# Altium PCB PCB1.PcbDoc (part 1 of 3)
Units mil, origin at the board's own origin, x right, y up, seen from the top; angles counter-clockwise.
Board outline 1929.13 x 1929.13 mil, 2 copper layers (Top Layer, Bottom Layer); 46 components, 43 nets, 184 pads, 94 vias.
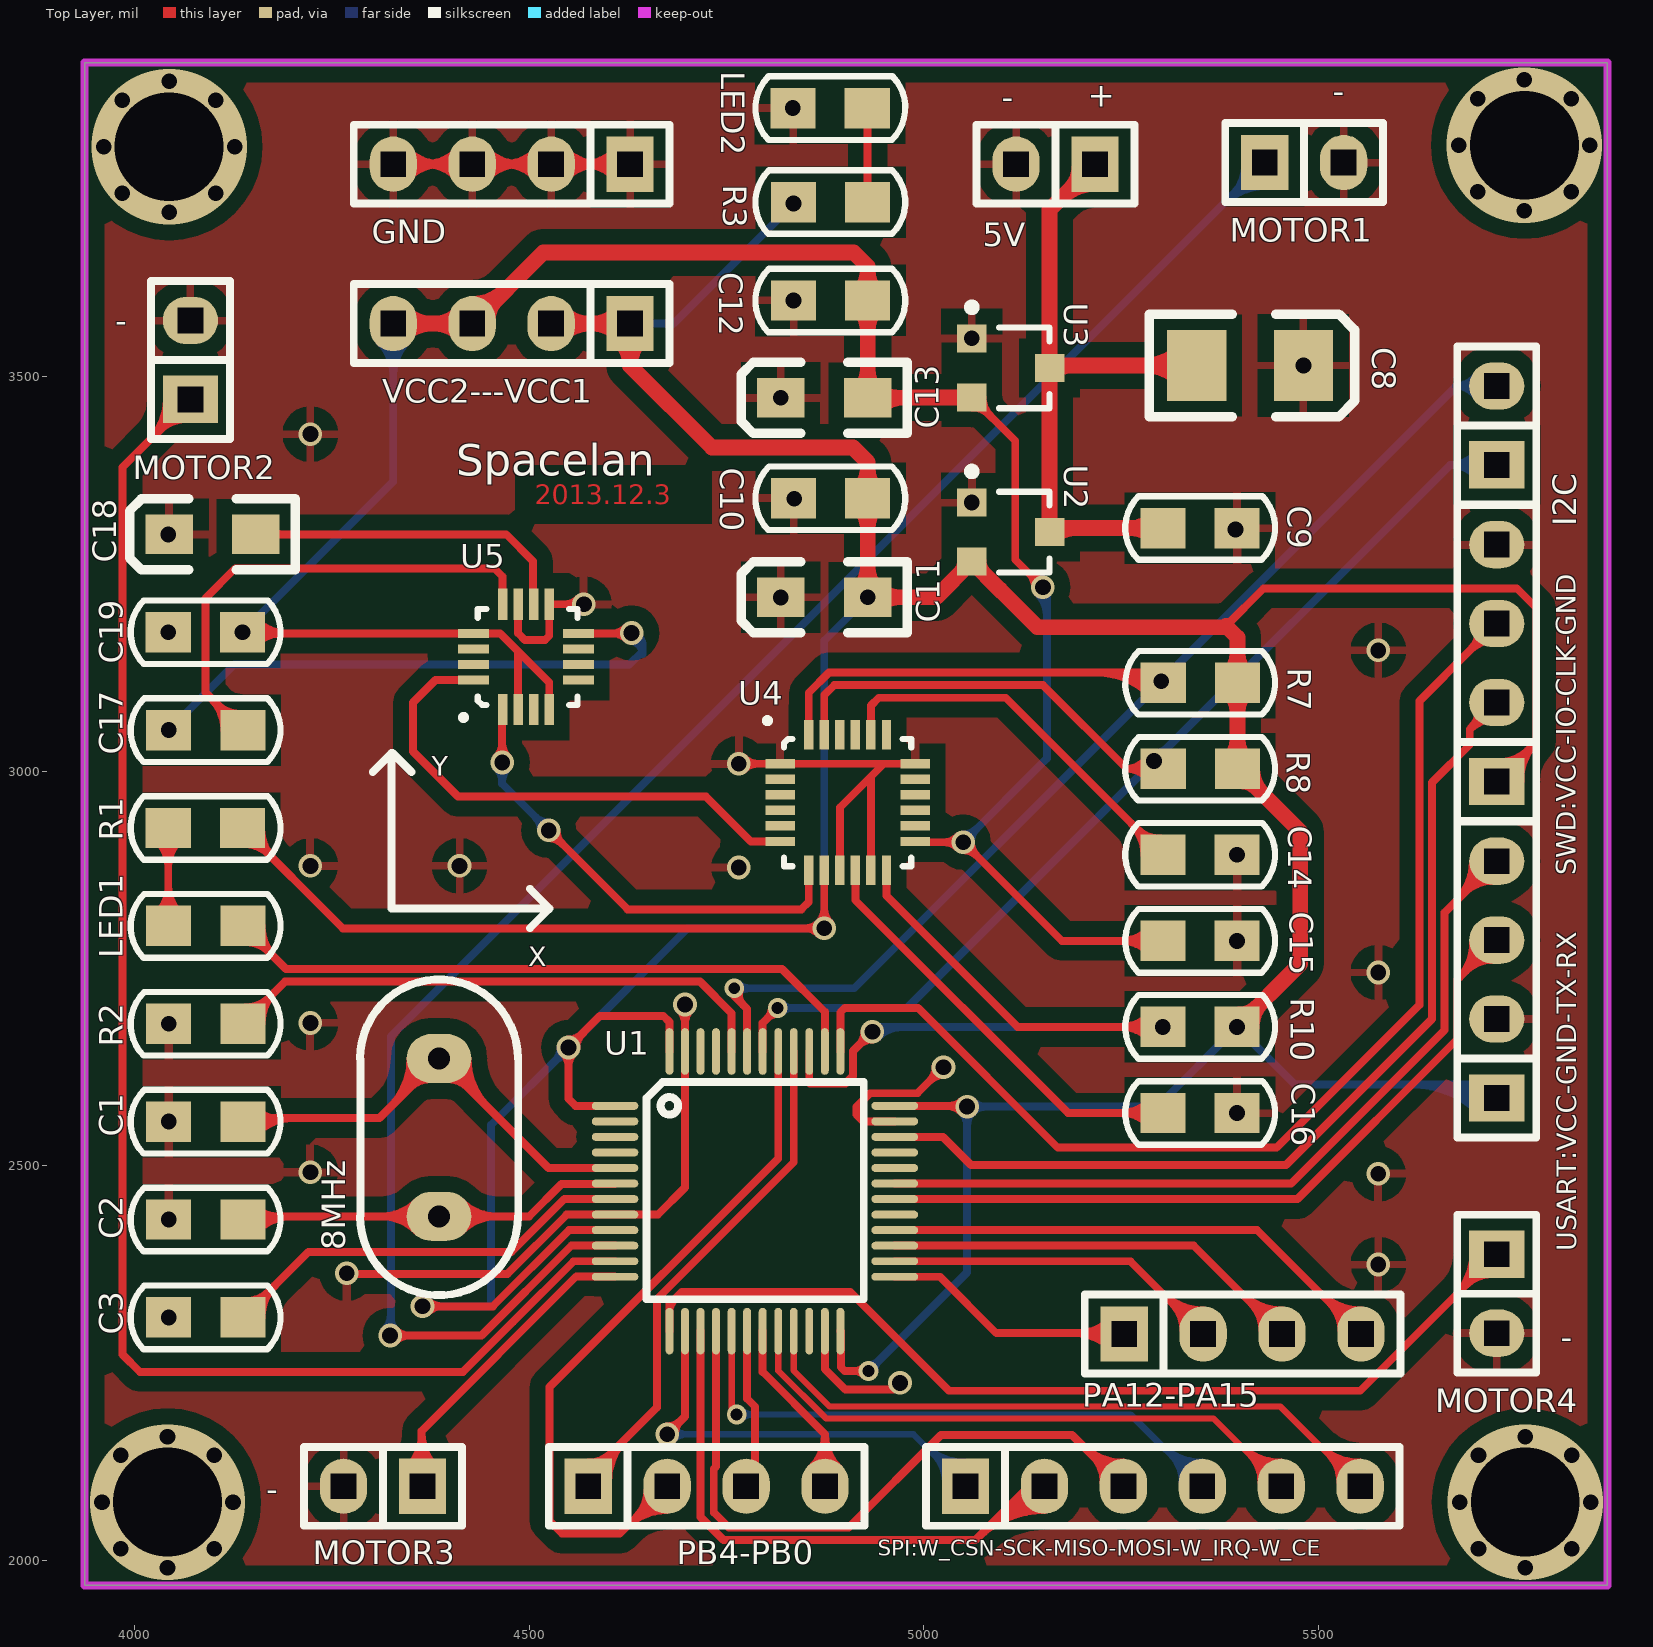
[diagram p0: Top Layer view]
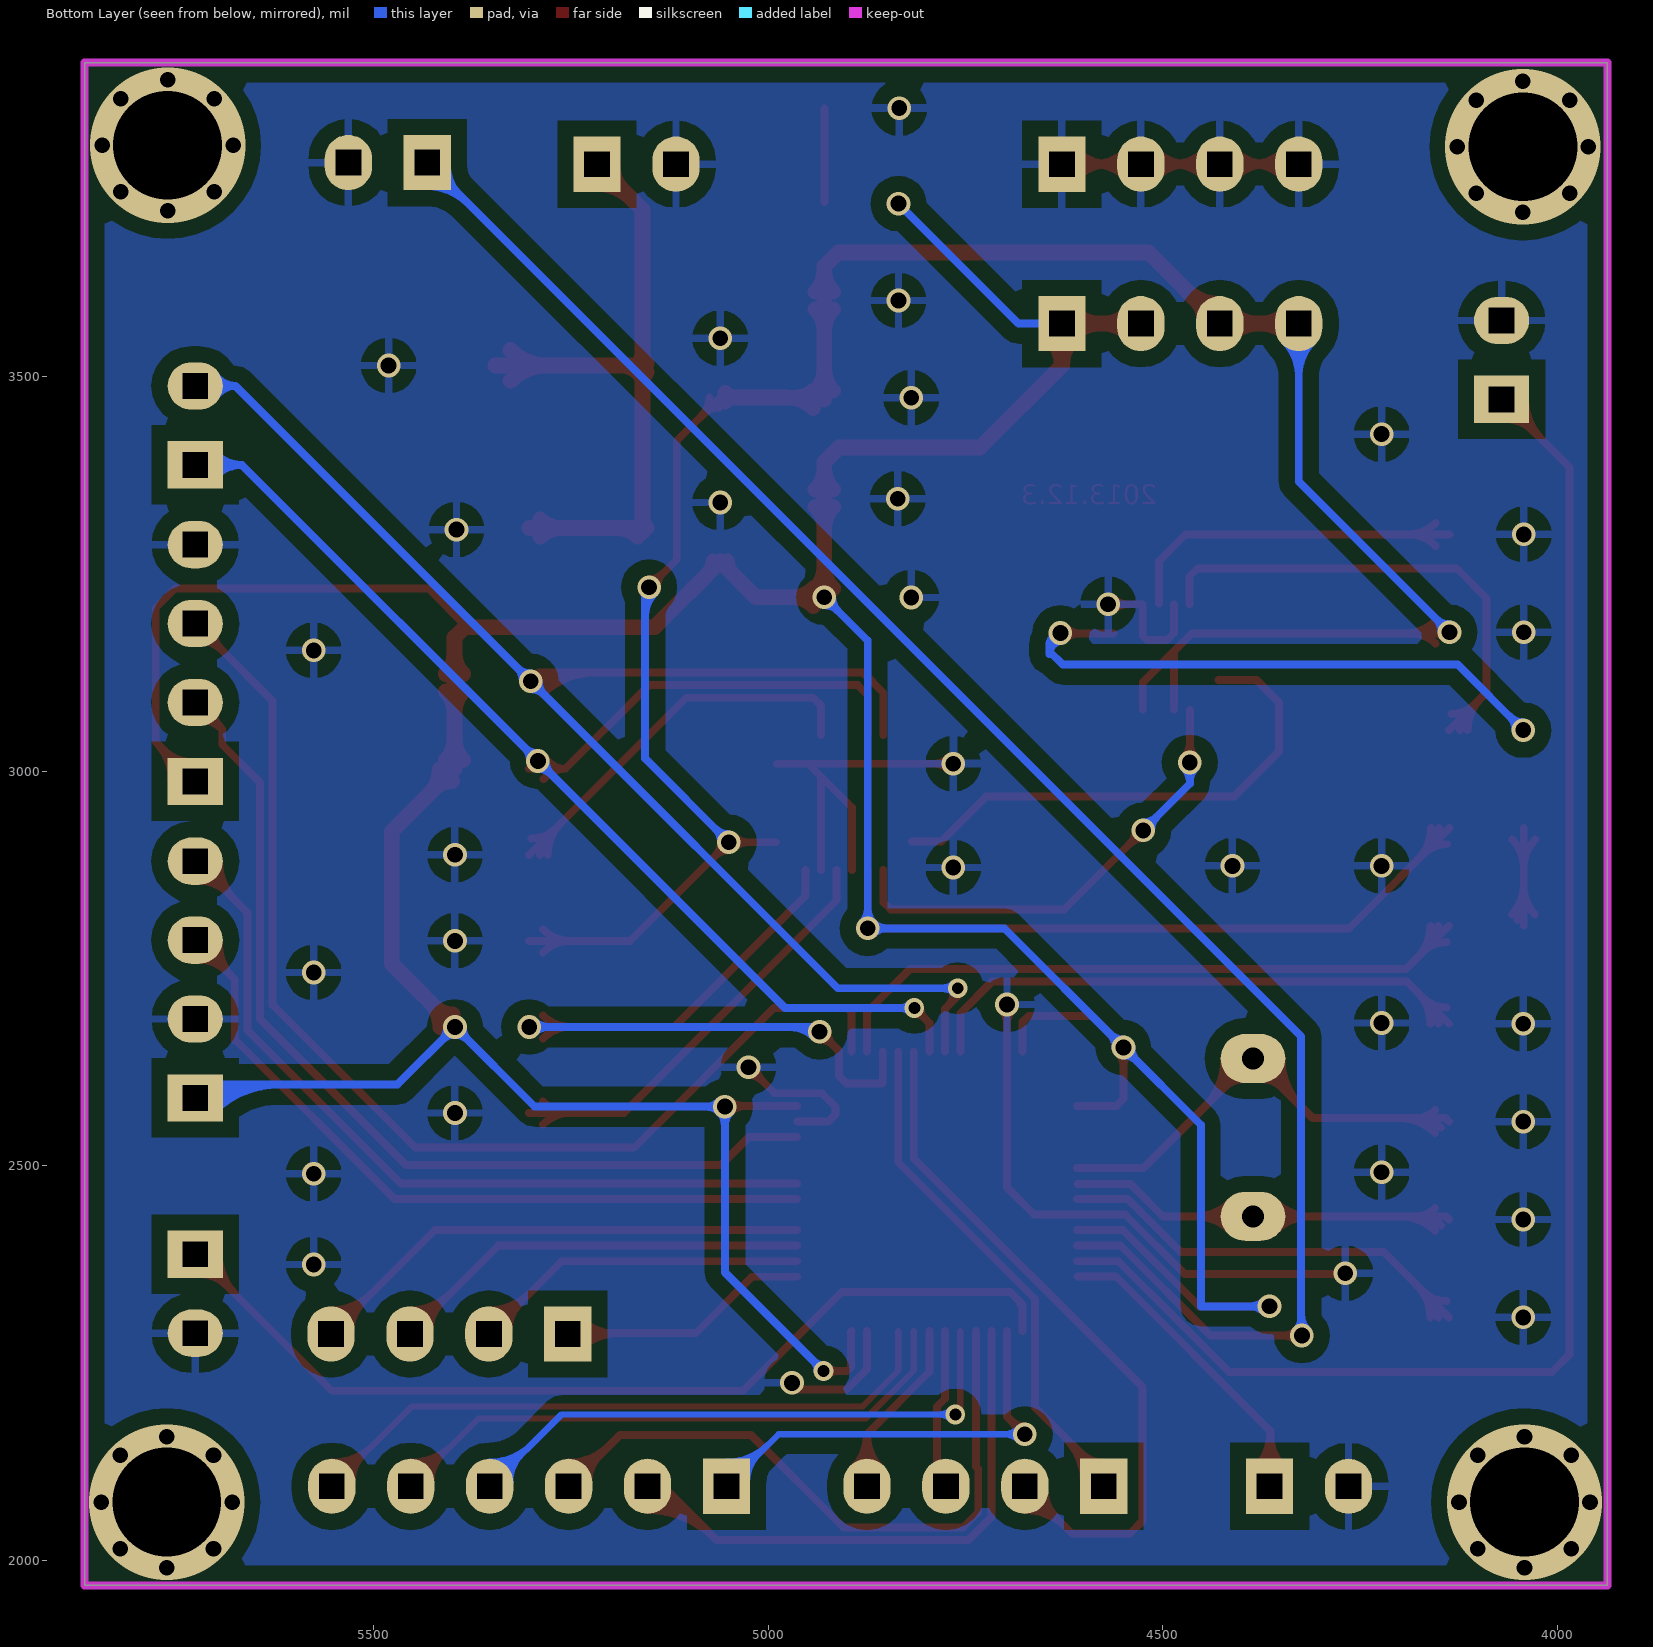
[diagram p1: Bottom Layer view, seen from below]

## Layer stack, top to bottom
Top Layer: signal copper 1.4
Dielectric: dielectric 12.6, FR-4, Dk 4.8
Bottom Layer: signal copper 1.4

## Board outline
3937.01,1968.5 5866.14,1968.5 5866.14,3897.64 3937.01,3897.64

## Design rules (kind name [scope] priority, off if disabled: settings)
Clearance Clearance_1 [InPolygon] p1: gap=20
Clearance [All] p2: gap=6
PolygonConnect [All] p1: connectstyle=Relief reliefconductorwidth=10 reliefentries=4 polygonreliefangle="90 Angle"
RoutingVias [All] p1: holewidth=20 width=40 viastyle="Through Hole" minholewidth=10 minwidth=10 maxholewidth=20 maxwidth=50
SilkscreenOverComponentPads [All] p1: minsilkscreentomaskgap=10
SolderMaskExpansion [All] p1: expansion=2
Width [All] p1: maxlimit=20 minlimit=6 preferedwidth=10
27 further rules are at their usual default settings.

## Classes and differential pairs
component class sensor: C14 C15 C16 C17 C18 C19 R7 R8 R10 U4 U5
component class mcu: 8MHz C1 C2 C3 I2C J20 LED1 MOTOR1 MOTOR2 MOTOR3 MOTOR4 PA12-PA15 PB4-PB0 R1 R2 SPI:W_CSN-SCK-MISO-MOSI-W_IRQ-W_CE SWD:VCC-IO-CLK-GND U1 USART:VCC-GND-TX-RX
component class BAT: 5V C8 C9 C10 C11 C12 C13 GND LED2 R3 U2 U3 VCC2---VCC1

## Components (designator, comment, footprint, x,y, rotation, side; value= is the part's Value field where it differs from the comment)
5V "CON2" SIP2 5167,3769 r180 top (schematic designator J12)
8MHz "XTAL_2PIN" XTAL 4386,2536 r90 top
C1 "20pf" linren_0805C 4043.5,2556 r0 top
C2 "20pf" linren_0805C 4043.5,2432 r0 top
C3 "0.1uf" linren_0805C 4043.5,2308 r0 top
C8 "47uf" 3528 5346,3514 r0 top
C9 "0.1uf" linren_0805C 5397,3308 r180 top
C10 "0.1uf" linren_0805C 4835,3345.67 r0 top
C11 "10uf" 3216 4929.06,3220.33 r180 top
C12 "0.1uf" linren_0805C 4835,3596.33 r0 top
C13 "10uf" 3216 4929.06,3473 r180 top
C14 "2.2nf" linren_0805C 5397,2894 r180 top
C15 "0.1uf" linren_0805C 5397,2785 r180 top
C16 "0.1uf" linren_0805C 5397,2567 r180 top
C17 "0.22uf" linren_0805C 4043.5,3052 r0 top
C18 "4.7uf" 3216 4154,3300 r180 top
C19 "0.1uf" linren_0805C 4137,3176 r180 top
GND "CON4" SIP4 4478,3769 r180 top (schematic designator J11)
I2C "CON2" SIP2 5726,3438 r90 top
LED1 "LED" linren_0805C 4043.5,2804 r0 top
LED2 "LED" linren_0805C 4928.5,3840 r180 top
MOTOR1 "CON2" SIP2 5482,3771 r0 top (schematic designator J5)
MOTOR2 "CON2" SIP2 4071,3521 r90 top (schematic designator J6)
MOTOR3 "CON2" SIP2 4315,2094 r180 top (schematic designator J7)
MOTOR4 "CON2" SIP2 5726,2338 r270 top (schematic designator J8)
PA12-PA15 "CON4" SIP4 5404,2287 r0 top
PB4-PB0 "CON44" SIP4 4725,2094 r0 top (schematic designator J9)
R1 "470" linren_0805C 4137,2928 r180 top
R2 "10k" linren_0805C 4043.5,2680 r0 top
R3 "470" linren_0805C 4835,3721 r0 top
R7 "10k" linren_0805C 5303.5,3112 r0 top
R8 "10k" linren_0805C 5303.5,3003 r0 top
R10 "10k" linren_0805C 5397,2676 r180 top
SPI:W_CSN-SCK-MISO-MOSI-W_IRQ-W_CE "CON6" SIP6 5053,2094 r0 top (schematic designator J1)
SWD:VCC-IO-CLK-GND "CON4" SIP4 5726,3137 r90 top (schematic designator J4)
U1 "STM32" LQFP-48 4609,2576 r0 top
U2 "me6206" "SOT 23" 5056,3340.33 r270 top
U3 "me6206" "SOT 23" 5056,3548.33 r270 top
U4 "MPU6050" "24 Lead QFN" 4809,2894 r0 top
U5 "HMC5883L" "16 Lead QFN 2" 4467,3080 r90 top
USART:VCC-GND-TX-RX "CON4" SIP4 5726,2736 r90 top (schematic designator J3)
VCC2---VCC1 "CON4" SIP4 4478,3567 r180 top (schematic designator J10)
? "" 固定过孔 4044,3791 r0 top
? "" 固定过孔 5761,3793 r0 top
? "" 固定过孔 5762,2074 r0 top
? "" 固定过孔 4042,2074 r0 top

## Footprints (in the part's own frame and the unit in brackets; to place one, negate y for a bottom-side part, rotate by r counter-clockwise, add the part's x,y. Pads: shape width x height; smd on the part's side, far side on the other; paste and mask are expansions set on the pad)
"16 Lead QFN 2" [mm]
  rect 1x0.3 smd: 1(-0.042,0.011) 2(-0.042,-0.489) 3(-0.042,-0.989) 4(-0.042,-1.489) 9(3.34,-1.489) 10(3.34,-0.989) 11(3.34,-0.489) 12(3.34,0.011)
  rect 0.3x1 smd: 5(0.899,-2.43) 6(1.399,-2.43) 7(1.899,-2.43) 8(2.399,-2.43) 13(2.399,0.952) 14(1.899,0.952) 15(1.399,0.952) 16(0.899,0.952)
  silkscreen extent -0.35,-2.4 3.18,1.32, body extent 0.13,-2.41 3.17,0.76, height 0.76
"24 Lead QFN" [mm]
  rect 0.95x0.3 smd: 1(0.228,2.932) 2(0.228,2.432) 3(0.228,1.932) 4(0.228,1.432) 5(0.228,0.932) 6(0.228,0.432) 13(4.578,0.432) 14(4.578,0.932) 15(4.578,1.432) 16(4.578,1.932) 17(4.578,2.432) 18(4.578,2.932)
  rect 0.3x0.95 smd: 7(1.153,-0.493) 8(1.653,-0.493) 9(2.153,-0.493) 10(2.653,-0.493) 11(3.153,-0.493) 12(3.653,-0.493) 19(3.653,3.857) 20(3.153,3.857) 21(2.653,3.857) 22(2.153,3.857) 23(1.653,3.857) 24(1.153,3.857)
  silkscreen extent -0.23,-0.37 4.45,4.37, body extent 0.38,-0.38 4.44,3.68, height 0.89
3216 [mil]
  rect 60x50 smd: A(0,0) K(110,0)
  silkscreen extent -50,-45 160,45
3528 [mil]
  rect 75x90 smd: A(0,0) K(135,0)
  silkscreen extent -60,-65 200,65
linren_0805C [mm]
  rect 1.45x1.3 smd: 1(0,0) 2(2.389,0)
  silkscreen extent -1.22,-1.02 3.6,1.02
LQFP-48 [mm]
  oval 1.5x0.254 smd: 1(0,0) 2(0,-0.5) 3(0,-1) 4(0,-1.5) 5(0,-2) 6(0,-2.5) 7(0,-3) 8(0,-3.5) 9(0,-4) 10(0,-4.5) 11(0,-5) 12(0,-5.5) 25(9,-5.5) 26(9,-5) 27(9,-4.5) 28(9,-4) 29(9,-3.5) 30(9,-3) 31(9,-2.5) 32(9,-2) 33(9,-1.5) 34(9,-1) 35(9,-0.5) 36(9,0)
  oval 0.254x1.5 smd: 13(1.75,-7.25) 14(2.25,-7.25) 15(2.75,-7.25) 16(3.25,-7.25) 17(3.75,-7.25) 18(4.25,-7.25) 19(4.75,-7.25) 20(5.25,-7.25) 21(5.75,-7.25) 22(6.25,-7.25) 23(6.75,-7.25) 24(7.25,-7.25) 37(7.25,1.75) 38(6.75,1.75) 39(6.25,1.75) 40(5.75,1.75) 41(5.25,1.75) 42(4.75,1.75) 43(4.25,1.75) 44(3.75,1.75) 45(3.25,1.75) 46(2.75,1.75) 47(2.25,1.75) 48(1.75,1.75)
  silkscreen extent 1.02,-6.22 8,0.76, body extent 0,-7.24 9,1.76, height 1.5
SIP2 [mil]
  rect 60x70 hole 32 square: 1(-50,0)
  oval 60x70 hole 32 square: 2(50,0)
  silkscreen extent -100,-50 100,50
SIP4 [mil]
  rect 60x70 hole 32 square: 1(-150,0)
  oval 60x70 hole 32 square: 2(-50,0) 3(50,0) 4(150,0)
  silkscreen extent -200,-50 200,50
SIP6 [mil]
  rect 60x70 hole 32 square: 1(0,0)
  oval 60x70 hole 32 square: 2(100,0) 3(200,0) 4(300,0) 5(400,0) 6(500,0)
  silkscreen extent -50,-50 550,50
"SOT 23" [mm]
  rect 0.9x0.95 smd: 1(0,0.127) 2(1.9,0.127) 3(0.95,2.627)
  silkscreen extent -1.12,0 2.25,2.63, body extent -0.38,0.51 2.29,2.29, height 0.89
XTAL [mil]
  oval 62x82 hole 28: 1(-100,0) 2(100,0)
  silkscreen extent -200,-100 200,100
固定过孔 [mil]

## Part data
5V PA12-PA15 SWD:VCC-IO-CLK-GND USART:VCC-GND-TX-RX: "Connector"
C1 C2 C3 C9 C10 C11 C12 C13 C14 C15 C16 C17 C18 C19: library part C
C8: library part "Cap 10uF", "Polarized Capacitor"
PB4-PB0: library part CON4, "Connector"
R1 R2 R3 R7 R8 R10: library part R
U1: library part Component_1_1
U2 U3: library part 78L05, "3-Terminal Positive Voltage Regulator"
U4 U5: library part Component_1

## Via types
v1: diameter 30, hole 20, Top Layer to Bottom Layer, 54 vias
v2: diameter 19.68, hole 19.68, Top Layer to Bottom Layer, 32 vias
v3: diameter 25, hole 15, Top Layer to Bottom Layer, 4 vias
v4: diameter 196.85, hole 137.8, Top Layer to Bottom Layer, 4 vias

## Nets (pads, with @x,y where several pads share a name; then routed paths per layer and width w, separated by ;. In a path a pad name is that pad's centre, name@x,y a point inside that pad or via, vN(x,y) a via of type N, cw(c..) or ccw(c..) an arc to the next point about the centre after c; other vN are vias at no path point)
AUX_CL: U4.7 U5.1 | length 1085.1
  Top Layer w10: v1(4466,3011) U5.1@4466,3077.78 ; v1(4525,2925) 4625,2825 4845,2825 4854.39,2834.39 U4.7@4854.39,2874.59 ; 4466,3035.14 cw(c4441.86,3035.14) 4458.93,3018.07 ccw(c4441.86,3035.14) 4466,3035.14 ; 4466,3035.14 ccw(c4490.14,3035.14) 4473.07,3018.07 cw(c4490.14,3035.14) 4466,3035.14 ; v1@4525,2915 cw(c4525,2890.86) 4542.07,2907.93 ; v1@4525,2915 cw(c4525,2890.86) 4542.07,2907.93 ; v1@4525,2915 cw(c4525,2890.86) 4542.07,2907.93 ; v1@4525,2915 cw(c4525,2890.86) 4542.07,2907.93 ; v1@4525,2917.5 cw(c4525,2899.39) 4537.8,2912.2 ; v1@4525,2917.5 cw(c4525,2899.39) 4537.8,2912.2 ; v1@4525,2917.5 cw(c4525,2899.39) 4537.8,2912.2 ; v1@4525,2917.5 cw(c4525,2899.39) 4537.8,2912.2 ; v1@4532.5,2925 ccw(c4550.61,2925) 4537.8,2912.2 ; v1@4532.5,2925 ccw(c4550.61,2925) 4537.8,2912.2 ; v1@4532.5,2925 ccw(c4550.61,2925) 4537.8,2912.2 ; v1@4532.5,2925 ccw(c4550.61,2925) 4537.8,2912.2 ; v1@4535,2925 ccw(c4559.14,2925) 4542.07,2907.93 ; v1@4535,2925 ccw(c4559.14,2925) 4542.07,2907.93 ; v1@4535,2925 ccw(c4559.14,2925) 4542.07,2907.93 ; v1@4535,2925 ccw(c4559.14,2925) 4542.07,2907.93
  Bottom Layer w10: v1(4466,3011) 4466,2984 v1(4525,2925) ; 4466,2986.86 cw(c4490.14,2986.86) 4473.07,3003.93 ccw(c4490.14,2986.86) 4466,2986.86 ; 4466,2986.86 ccw(c4441.86,2986.86) 4458.93,3003.93 cw(c4441.86,2986.86) 4466,2986.86 ; 4507.93,2942.07 cw(c4490.86,2925) 4515,2925 ccw(c4490.86,2925) 4507.93,2942.07 ; 4507.93,2942.07 ccw(c4525,2959.14) 4525,2935 cw(c4525,2959.14) 4507.93,2942.07
AUX_DA: U4.6 U5.16 | length 662.5
  Top Layer w10: U5.16@4429.52,3115.39 4381.39,3115.39 4353,3087 4353,3025 4410,2968 4724.02,2968 4781.01,2911.01 U4.6@4817.98,2911.01
BAT: 5V.1 C8.A C9.2 U2.3 U3.3 | length 1682.7
  Top Layer w20: U2.3@5159.43,3302.93 U3.3@5159.43,3510.93 5159.43,3711.43 5V.1@5217,3769 ; U2.3@5164.49,3308 C9.2@5302.94,3308 ; U2.3@5165.87,3297.48 cw(c5191.27,3272.07) 5191.27,3308 ; U3.3@5165.87,3505.48 cw(c5186.45,3484.89) 5186.45,3514 ; U3.3@5167.27,3514 C8.A@5346,3514 ; 5174.32,3726.32 cw(c5217,3683.64) 5V.1@5217,3744 ; 5186.39,3738.39 ccw(c5160.79,3764) 5V.1@5197,3764 ; C9.2@5288.96,3296.98 ccw(c5262.35,3270.36) 5262.35,3308 ccw(c5262.35,3345.64) C9.2@5288.96,3319.02 ; C8.A@5326.55,3494.55 ccw(c5279.61,3447.61) 5279.61,3514 ccw(c5279.61,3580.39) C8.A@5326.55,3533.45 ; U2.3@5153.97,3308.39 ccw(c5140.79,3321.56) 5159.43,3321.56 ; U2.3@5153.97,3308.39 ccw(c5140.8,3321.56) 5159.43,3321.56 ; U2.3@5153.97,3308.39 ccw(c5140.8,3321.56) 5159.43,3321.56 ; U2.3@5153.97,3308.39 ccw(c5140.8,3321.56) 5159.43,3321.56 ; U2.3@5153.97,3308.39 ccw(c5140.8,3321.56) 5159.43,3321.56 ; U2.3@5153.97,3308.39 ccw(c5140.8,3321.56) 5159.43,3321.56 ; U2.3@5153.97,3308.39 ccw(c5140.8,3321.56) 5159.43,3321.56 ; U2.3@5153.97,3308.39 ccw(c5140.8,3321.56) 5159.43,3321.56 ; U3.3@5153.97,3505.48 cw(c5140.8,3492.3) 5159.43,3492.3 ; U3.3@5153.97,3505.48 cw(c5140.8,3492.3) 5159.43,3492.3 ; U3.3@5153.97,3505.48 cw(c5140.8,3492.3) 5159.43,3492.3 ; U3.3@5153.97,3505.48 cw(c5140.8,3492.3) 5159.43,3492.3 ; U3.3@5153.97,3505.48 cw(c5140.8,3492.3) 5159.43,3492.3 ; U3.3@5153.97,3505.48 cw(c5140.8,3492.3) 5159.43,3492.3 ; U3.3@5153.97,3505.48 cw(c5140.8,3492.3) 5159.43,3492.3 ; U3.3@5153.97,3505.48 cw(c5140.8,3492.3) 5159.43,3492.3 ; U3.3@5153.97,3516.39 ccw(c5140.8,3529.56) 5159.43,3529.56 ; U3.3@5153.97,3516.39 ccw(c5140.8,3529.56) 5159.43,3529.56 ; U3.3@5153.97,3516.39 ccw(c5140.8,3529.56) 5159.43,3529.56 ; U3.3@5153.97,3516.39 ccw(c5140.8,3529.56) 5159.43,3529.56 ; U3.3@5153.97,3516.39 ccw(c5140.8,3529.56) 5159.43,3529.56 ; U3.3@5153.97,3516.39 ccw(c5140.8,3529.56) 5159.43,3529.56 ; U3.3@5153.97,3516.39 ccw(c5140.8,3529.56) 5159.43,3529.56 ; U3.3@5153.97,3516.39 ccw(c5140.8,3529.56) 5159.43,3529.56 ; 5159.43,3321.56 ccw(c5178.05,3321.56) U2.3@5164.88,3308.39 ; 5159.43,3321.56 ccw(c5178.06,3321.56) U2.3@5164.88,3308.39 ; 5159.43,3321.56 ccw(c5178.06,3321.56) U2.3@5164.88,3308.39 ; 5159.43,3321.56 ccw(c5178.06,3321.56) U2.3@5164.88,3308.39 ; 5159.43,3492.3 cw(c5178.06,3492.3) U3.3@5164.88,3505.48 ; 5159.43,3492.3 cw(c5178.06,3492.3) U3.3@5164.88,3505.48 ; 5159.43,3492.3 cw(c5178.06,3492.3) U3.3@5164.88,3505.48 ; 5159.43,3492.3 cw(c5178.06,3492.3) U3.3@5164.88,3505.48 ; 5159.43,3529.56 ccw(c5178.06,3529.56) U3.3@5164.88,3516.39 ; 5159.43,3529.56 ccw(c5178.06,3529.56) U3.3@5164.88,3516.39 ; 5159.43,3529.56 ccw(c5178.06,3529.56) U3.3@5164.88,3516.39 ; 5159.43,3529.56 ccw(c5178.06,3529.56) U3.3@5164.88,3516.39 ; 5159.43,3529.56 ccw(c5178.06,3529.56) U3.3@5164.88,3516.39 ; 5159.43,3529.56 ccw(c5178.06,3529.56) U3.3@5164.88,3516.39 ; 5159.43,3529.56 ccw(c5178.06,3529.56) U3.3@5164.88,3516.39 ; 5159.43,3529.56 ccw(c5178.06,3529.56) U3.3@5164.88,3516.39
COM_RXD: U1.31 USART:VCC-GND-TX-RX.4 | length 1846.2
  Top Layer w10: U1.31@4963.33,2477.58 5465.58,2477.58 5660,2672 5660,2821 USART:VCC-GND-TX-RX.4@5726,2887 ; 5675.49,2836.49 ccw(c5625.99,2886) USART:VCC-GND-TX-RX.4@5696,2886 ; 5675.49,2836.49 ccw(c5625.99,2886) USART:VCC-GND-TX-RX.4@5696,2886 ; 5675.49,2836.49 ccw(c5625.99,2886) USART:VCC-GND-TX-RX.4@5696,2886 ; 5675.49,2836.49 ccw(c5625.99,2886) USART:VCC-GND-TX-RX.4@5696,2886 ; 5685.15,2846.15 cw(c5721,2810.3) USART:VCC-GND-TX-RX.4@5721,2861 ; 5685.15,2846.15 cw(c5721,2810.3) USART:VCC-GND-TX-RX.4@5721,2861 ; 5685.15,2846.15 cw(c5721,2810.3) USART:VCC-GND-TX-RX.4@5721,2861 ; 5685.15,2846.15 cw(c5721,2810.3) USART:VCC-GND-TX-RX.4@5721,2861 ; 5691.86,2852.86 cw(c5726,2818.72) USART:VCC-GND-TX-RX.4@5726,2867 ; 5691.86,2852.86 ccw(c5657.72,2887) USART:VCC-GND-TX-RX.4@5706,2887 ; 5691.86,2852.86 cw(c5726,2818.72) USART:VCC-GND-TX-RX.4@5726,2867 ; 5691.86,2852.86 ccw(c5657.72,2887) USART:VCC-GND-TX-RX.4@5706,2887 ; 5691.86,2852.86 cw(c5726,2818.72) USART:VCC-GND-TX-RX.4@5726,2867 ; 5691.86,2852.86 ccw(c5657.72,2887) USART:VCC-GND-TX-RX.4@5706,2887 ; 5691.86,2852.86 cw(c5726,2818.72) USART:VCC-GND-TX-RX.4@5726,2867 ; 5691.86,2852.86 ccw(c5657.72,2887) USART:VCC-GND-TX-RX.4@5706,2887 ; 5692.56,2853.56 ccw(c5660.13,2886) USART:VCC-GND-TX-RX.4@5706,2886 ; 5692.56,2853.56 ccw(c5660.13,2886) USART:VCC-GND-TX-RX.4@5706,2886 ; 5692.56,2853.56 ccw(c5660.13,2886) USART:VCC-GND-TX-RX.4@5706,2886 ; 5692.56,2853.56 ccw(c5660.13,2886) USART:VCC-GND-TX-RX.4@5706,2886
COM_TXD: U1.30 USART:VCC-GND-TX-RX.3 | length 1434.6
  Top Layer w10: U1.30@4963.33,2457.89 5473.66,2457.89 5674.77,2659 5676,2659 5676,2736 USART:VCC-GND-TX-RX.3@5726,2786 ; 5678.5,2738.5 ccw(c5635.92,2781.09) USART:VCC-GND-TX-RX.3@5696.04,2784.56 ; 5678.5,2738.5 ccw(c5635.92,2781.09) USART:VCC-GND-TX-RX.3@5696.04,2784.56 ; 5678.5,2738.5 ccw(c5635.92,2781.09) USART:VCC-GND-TX-RX.3@5696.04,2784.56 ; 5678.5,2738.5 ccw(c5635.92,2781.09) USART:VCC-GND-TX-RX.3@5696.04,2784.56 ; 5686.86,2746.86 cw(c5721,2712.72) USART:VCC-GND-TX-RX.3@5721,2761 ; 5686.86,2746.86 cw(c5721,2712.72) USART:VCC-GND-TX-RX.3@5721,2761 ; 5686.86,2746.86 cw(c5721,2712.72) USART:VCC-GND-TX-RX.3@5721,2761 ; 5686.86,2746.86 cw(c5721,2712.72) USART:VCC-GND-TX-RX.3@5721,2761 ; 5694.27,2754.27 ccw(c5665.73,2782.81) USART:VCC-GND-TX-RX.3@5706.02,2785.14 ; 5694.27,2754.27 ccw(c5665.73,2782.81) USART:VCC-GND-TX-RX.3@5706.02,2785.14 ; 5694.27,2754.27 ccw(c5665.73,2782.81) USART:VCC-GND-TX-RX.3@5706.02,2785.14 ; 5694.27,2754.27 ccw(c5665.73,2782.81) USART:VCC-GND-TX-RX.3@5706.02,2785.14
GND: 5V.2 C1.1 C2.1 C3.1 C8.K C9.1 C10.1 C11.K C12.1 C13.K C14.1 C15.1 C16.1 C18.K C19.2 GND.1 GND.2 GND.3 GND.4 LED2.2 MOTOR1.2 MOTOR2.2 MOTOR3.2 MOTOR4.2 R2.1 SWD:VCC-IO-CLK-GND.4 U1.8 U1.23 U1.35 U1.47 U2.1 U3.1 U4.1 U4.9 U4.11 U4.18 U5.9 U5.11 USART:VCC-GND-TX-RX.2 | length 7402.7
  Top Layer w10: v1@4270,2363 4472.49,2363 4547.69,2438.2 U1.8@4609,2438.2 4663.2,2438.2 4697.58,2472.58 U1.47@4697.58,2644.9 v1(4697.58,2704.42) ; GND.4@4328,3769 GND.3@4428,3769 GND.2@4528,3769 GND.1@4628,3769 ; U5.11@4486.25,3211.5 4486.25,3174.75 4495,3166 4520,3166 4525.62,3171.62 U5.9@4525.62,3211.5 v1(4569.5,3211.5) ; v1(4765.57,3009.43) U4.1@4817.98,3009.43 4949.43,3009.43 ; U1.23@4874.75,2290.57 4874.75,2242.62 4900.87,2216.5 4961.5,2216.5 v1(4970,2225) ; U4.9@4893.76,2874.59 4893.76,2953.76 4949.43,3009.43 ; U4.11@4933.13,2874.59 4933.13,2990.08 ; U1.35@4963.33,2556.32 4923.68,2556.32 4915,2565 4915,2574.82 4932.18,2592 4992,2592 v1(5025,2625) ; U4.18@4989.24,3009.43 4949.43,3009.43 ; GND.4@4338.61,3758.39 cw(c4364.21,3732.79) 4364.21,3769 ; GND.4@4338.61,3758.39 cw(c4364.21,3732.79) 4364.21,3769 ; GND.4@4338.61,3758.39 cw(c4364.21,3732.79) 4364.21,3769 ; GND.4@4338.61,3758.39 cw(c4364.21,3732.79) 4364.21,3769 ; GND.4@4338.61,3758.39 cw(c4364.21,3732.79) 4364.21,3769 ; GND.4@4338.61,3779.61 ccw(c4364.21,3805.21) 4364.21,3769 ; GND.4@4338.61,3779.61 ccw(c4364.21,3805.21) 4364.21,3769 ; GND.4@4338.61,3779.61 ccw(c4364.21,3805.21) 4364.21,3769 ; GND.4@4338.61,3779.61 ccw(c4364.21,3805.21) 4364.21,3769 ; GND.4@4338.61,3779.61 ccw(c4364.21,3805.21) 4364.21,3769 ; GND.4@4345.68,3751.32 cw(c4388.36,3708.64) 4388.36,3769 ; GND.4@4345.68,3751.32 cw(c4388.36,3708.64) 4388.36,3769 ; GND.4@4345.68,3751.32 cw(c4388.36,3708.64) 4388.36,3769 ; GND.4@4345.68,3751.32 cw(c4388.36,3708.64) 4388.36,3769 ; GND.4@4345.68,3751.32 cw(c4388.36,3708.64) 4388.36,3769 ; GND.4@4345.68,3786.68 ccw(c4388.36,3829.36) 4388.36,3769 ; GND.4@4345.68,3786.68 ccw(c4388.36,3829.36) 4388.36,3769 ; GND.4@4345.68,3786.68 ccw(c4388.36,3829.36) 4388.36,3769 ; GND.4@4345.68,3786.68 ccw(c4388.36,3829.36) 4388.36,3769 ; GND.4@4345.68,3786.68 ccw(c4388.36,3829.36) 4388.36,3769 ; 4367.64,3769 cw(c4367.64,3708.64) GND.3@4410.32,3751.32 ; 4367.64,3769 ccw(c4367.64,3829.36) GND.3@4410.32,3786.68 ; 4367.64,3769 cw(c4367.64,3708.64) GND.3@4410.32,3751.32 ; 4367.64,3769 ccw(c4367.64,3829.36) GND.3@4410.32,3786.68 ; 4367.64,3769 cw(c4367.64,3708.64) GND.3@4410.32,3751.32 ; 4367.64,3769 ccw(c4367.64,3829.36) GND.3@4410.32,3786.68 ; 4367.64,3769 ccw(c4367.64,3829.36) GND.3@4410.32,3786.68 ; 4367.64,3769 cw(c4367.64,3708.64) GND.3@4410.32,3751.32 ; 4367.64,3769 ccw(c4367.64,3829.36) GND.3@4410.32,3786.68 ; 4367.64,3769 cw(c4367.64,3708.64) GND.3@4410.32,3751.32 ; 4391.79,3769 cw(c4391.79,3732.79) GND.3@4417.39,3758.39 ; 4391.79,3769 ccw(c4391.79,3805.21) GND.3@4417.39,3779.61 ; 4391.79,3769 cw(c4391.79,3732.79) GND.3@4417.39,3758.39 ; 4391.79,3769 ccw(c4391.79,3805.21) GND.3@4417.39,3779.61 ; 4391.79,3769 cw(c4391.79,3732.79) GND.3@4417.39,3758.39 ; 4391.79,3769 ccw(c4391.79,3805.21) GND.3@4417.39,3779.61 ; 4391.79,3769 ccw(c4391.79,3805.21) GND.3@4417.39,3779.61 ; 4391.79,3769 cw(c4391.79,3732.79) GND.3@4417.39,3758.39 ; 4391.79,3769 ccw(c4391.79,3805.21) GND.3@4417.39,3779.61 ; 4391.79,3769 cw(c4391.79,3732.79) GND.3@4417.39,3758.39 ; GND.3@4438.61,3758.39 cw(c4464.21,3732.79) 4464.21,3769 ; GND.3@4438.61,3758.39 cw(c4464.21,3732.79) 4464.21,3769 ; GND.3@4438.61,3758.39 cw(c4464.21,3732.79) 4464.21,3769 ; GND.3@4438.61,3758.39 cw(c4464.21,3732.79) 4464.21,3769 ; GND.3@4438.61,3758.39 cw(c4464.21,3732.79) 4464.21,3769 ; GND.3@4438.61,3779.61 ccw(c4464.21,3805.21) 4464.21,3769 ; GND.3@4438.61,3779.61 ccw(c4464.21,3805.21) 4464.21,3769 ; GND.3@4438.61,3779.61 ccw(c4464.21,3805.21) 4464.21,3769 ; GND.3@4438.61,3779.61 ccw(c4464.21,3805.21) 4464.21,3769 ; GND.3@4438.61,3779.61 ccw(c4464.21,3805.21) 4464.21,3769 ; GND.3@4445.68,3751.32 cw(c4488.36,3708.64) 4488.36,3769 ; GND.3@4445.68,3751.32 cw(c4488.36,3708.64) 4488.36,3769 ; GND.3@4445.68,3751.32 cw(c4488.36,3708.64) 4488.36,3769 ; GND.3@4445.68,3751.32 cw(c4488.36,3708.64) 4488.36,3769 ; GND.3@4445.68,3751.32 cw(c4488.36,3708.64) 4488.36,3769 ; GND.3@4445.68,3786.68 ccw(c4488.36,3829.36) 4488.36,3769 ; GND.3@4445.68,3786.68 ccw(c4488.36,3829.36) 4488.36,3769 ; GND.3@4445.68,3786.68 ccw(c4488.36,3829.36) 4488.36,3769 ; GND.3@4445.68,3786.68 ccw(c4488.36,3829.36) 4488.36,3769 ; GND.3@4445.68,3786.68 ccw(c4488.36,3829.36) 4488.36,3769 ; 4467.64,3769 cw(c4467.64,3708.64) GND.2@4510.32,3751.32 ; 4467.64,3769 ccw(c4467.64,3829.36) GND.2@4510.32,3786.68 ; 4467.64,3769 cw(c4467.64,3708.64) GND.2@4510.32,3751.32 ; 4467.64,3769 ccw(c4467.64,3829.36) GND.2@4510.32,3786.68 ; 4467.64,3769 cw(c4467.64,3708.64) GND.2@4510.32,3751.32 ; 4467.64,3769 ccw(c4467.64,3829.36) GND.2@4510.32,3786.68 ; 4467.64,3769 ccw(c4467.64,3829.36) GND.2@4510.32,3786.68 ; 4467.64,3769 cw(c4467.64,3708.64) GND.2@4510.32,3751.32 ; 4467.64,3769 ccw(c4467.64,3829.36) GND.2@4510.32,3786.68 ; 4467.64,3769 cw(c4467.64,3708.64) GND.2@4510.32,3751.32 ; 4491.79,3769 cw(c4491.79,3732.79) GND.2@4517.39,3758.39 ; 4491.79,3769 ccw(c4491.79,3805.21) GND.2@4517.39,3779.61 ; 4491.79,3769 cw(c4491.79,3732.79) GND.2@4517.39,3758.39 ; 4491.79,3769 ccw(c4491.79,3805.21) GND.2@4517.39,3779.61 ; 4491.79,3769 cw(c4491.79,3732.79) GND.2@4517.39,3758.39 ; 4491.79,3769 ccw(c4491.79,3805.21) GND.2@4517.39,3779.61 ; 4491.79,3769 ccw(c4491.79,3805.21) GND.2@4517.39,3779.61 ; 4491.79,3769 cw(c4491.79,3732.79) GND.2@4517.39,3758.39 ; 4491.79,3769 ccw(c4491.79,3805.21) GND.2@4517.39,3779.61 ; 4491.79,3769 cw(c4491.79,3732.79) GND.2@4517.39,3758.39 ; GND.2@4538.61,3758.39 cw(c4564.21,3732.79) 4564.21,3769 ; GND.2@4538.61,3758.39 cw(c4564.21,3732.79) 4564.21,3769 ; GND.2@4538.61,3758.39 cw(c4564.21,3732.79) 4564.21,3769 ; GND.2@4538.61,3758.39 cw(c4564.21,3732.79) 4564.21,3769 ; GND.2@4538.61,3758.39 cw(c4564.21,3732.79) 4564.21,3769 ; GND.2@4538.61,3779.61 ccw(c4564.21,3805.21) 4564.21,3769 ; GND.2@4538.61,3779.61 ccw(c4564.21,3805.21) 4564.21,3769 ; GND.2@4538.61,3779.61 ccw(c4564.21,3805.21) 4564.21,3769 ; GND.2@4538.61,3779.61 ccw(c4564.21,3805.21) 4564.21,3769 ; GND.2@4538.61,3779.61 ccw(c4564.21,3805.21) 4564.21,3769 ; 4545.36,3211.5 cw(c4545.36,3187.35) v1@4562.43,3204.42 ; 4545.36,3211.5 ccw(c4545.36,3235.64) v1@4562.43,3218.57 ; 4545.36,3211.5 cw(c4545.36,3187.35) v1@4562.43,3204.42 ; 4545.36,3211.5 ccw(c4545.36,3235.64) v1@4562.43,3218.57 ; 4545.36,3211.5 ccw(c4545.36,3235.64) v1@4562.43,3218.57 ; 4545.36,3211.5 cw(c4545.36,3187.35) v1@4562.43,3204.42 ; 4545.36,3211.5 ccw(c4545.36,3235.64) v1@4562.43,3218.57 ; 4545.36,3211.5 cw(c4545.36,3187.35) v1@4562.43,3204.42 ; GND.2@4545.68,3751.32 cw(c4588.36,3708.64) 4588.36,3769 ; GND.2@4545.68,3751.32 cw(c4588.36,3708.64) 4588.36,3769 ; GND.2@4545.68,3751.32 cw(c4588.36,3708.64) 4588.36,3769 ; GND.2@4545.68,3751.32 cw(c4588.36,3708.64) 4588.36,3769 ; GND.2@4545.68,3751.32 cw(c4588.36,3708.64) 4588.36,3769 ; GND.2@4545.68,3786.68 ccw(c4588.36,3829.36) 4588.36,3769 ; GND.2@4545.68,3786.68 ccw(c4588.36,3829.36) 4588.36,3769 ; GND.2@4545.68,3786.68 ccw(c4588.36,3829.36) 4588.36,3769 ; GND.2@4545.68,3786.68 ccw(c4588.36,3829.36) 4588.36,3769 ; GND.2@4545.68,3786.68 ccw(c4588.36,3829.36) 4588.36,3769 ; 4551.4,3211.5 cw(c4551.4,3193.39) v1@4564.2,3206.19 ; 4551.4,3211.5 ccw(c4551.4,3229.6) v1@4564.2,3216.8 ; 4551.4,3211.5 cw(c4551.4,3193.39) v1@4564.2,3206.19 ; 4551.4,3211.5 ccw(c4551.4,3229.6) v1@4564.2,3216.8 ; 4551.4,3211.5 cw(c4551.4,3193.39) v1@4564.2,3206.19 ; 4551.4,3211.5 ccw(c4551.4,3229.6) v1@4564.2,3216.8 ; 4551.4,3211.5 cw(c4551.4,3193.39) v1@4564.2,3206.19 ; 4551.4,3211.5 ccw(c4551.4,3229.6) v1@4564.2,3216.8 ; 4567.64,3769 cw(c4567.64,3708.64) GND.1@4610.32,3751.32 ; 4567.64,3769 ccw(c4567.64,3829.36) GND.1@4610.32,3786.68 ; 4567.64,3769 cw(c4567.64,3708.64) GND.1@4610.32,3751.32 ; 4567.64,3769 ccw(c4567.64,3829.36) GND.1@4610.32,3786.68 ; 4567.64,3769 cw(c4567.64,3708.64) GND.1@4610.32,3751.32 ; 4567.64,3769 ccw(c4567.64,3829.36) GND.1@4610.32,3786.68 ; 4567.64,3769 ccw(c4567.64,3829.36) GND.1@4610.32,3786.68 ; 4567.64,3769 cw(c4567.64,3708.64) GND.1@4610.32,3751.32 ; 4567.64,3769 ccw(c4567.64,3829.36) GND.1@4610.32,3786.68 ; 4567.64,3769 cw(c4567.64,3708.64) GND.1@4610.32,3751.32 ; 4591.79,3769 cw(c4591.79,3732.79) GND.1@4617.39,3758.39 ; 4591.79,3769 ccw(c4591.79,3805.21) GND.1@4617.39,3779.61 ; 4591.79,3769 cw(c4591.79,3732.79) GND.1@4617.39,3758.39 ; 4591.79,3769 ccw(c4591.79,3805.21) GND.1@4617.39,3779.61 ; 4591.79,3769 cw(c4591.79,3732.79) GND.1@4617.39,3758.39 ; 4591.79,3769 ccw(c4591.79,3805.21) GND.1@4617.39,3779.61 ; 4591.79,3769 ccw(c4591.79,3805.21) GND.1@4617.39,3779.61 ; 4591.79,3769 cw(c4591.79,3732.79) GND.1@4617.39,3758.39 ; 4591.79,3769 ccw(c4591.79,3805.21) GND.1@4617.39,3779.61 ; 4591.79,3769 cw(c4591.79,3732.79) GND.1@4617.39,3758.39 ; v1@4690.51,2697.35 cw(c4673.44,2680.28) 4697.58,2680.28 ; v1@4690.51,2697.35 cw(c4673.44,2680.28) 4697.58,2680.28 ; v1@4690.51,2697.35 cw(c4673.44,2680.28) 4697.58,2680.28 ; v1@4690.51,2697.35 cw(c4673.44,2680.28) 4697.58,2680.28 ; 4697.58,2680.28 cw(c4721.72,2680.28) v1@4704.65,2697.35 ; 4697.58,2680.28 cw(c4721.72,2680.28) v1@4704.65,2697.35 ; 4697.58,2680.28 cw(c4721.72,2680.28) v1@4704.65,2697.35 ; 4697.58,2680.28 cw(c4721.72,2680.28) v1@4704.65,2697.35 ; v1@4772.64,3002.36 cw(c4789.71,2985.29) 4789.71,3009.43 ; v1@4772.64,3002.36 cw(c4789.71,2985.29) 4789.71,3009.43 ; v1@4772.64,3002.36 cw(c4789.71,2985.29) 4789.71,3009.43 ; v1@4772.64,3002.36 cw(c4789.71,2985.29) 4789.71,3009.43 ; v1@4772.64,3016.5 ccw(c4789.71,3033.57) 4789.71,3009.43 ; v1@4772.64,3016.5 ccw(c4789.71,3033.57) 4789.71,3009.43 ; v1@4772.64,3016.5 ccw(c4789.71,3033.57) 4789.71,3009.43 ; v1@4772.64,3016.5 ccw(c4789.71,3033.57) 4789.71,3009.43 ; 5007.93,2607.93 cw(c5025,2590.86) v1@5025,2615 ; 5007.93,2607.93 ccw(c4990.86,2625) v1@5015,2625 ; 5007.93,2607.93 cw(c5025,2590.86) v1@5025,2615 ; 5007.93,2607.93 ccw(c4990.86,2625) v1@5015,2625 ; 5007.93,2607.93 ccw(c4990.86,2625) v1@5015,2625 ; 5007.93,2607.93 cw(c5025,2590.86) v1@5025,2615 ; 5007.93,2607.93 ccw(c4990.86,2625) v1@5015,2625 ; 5007.93,2607.93 cw(c5025,2590.86) v1@5025,2615 ; 5012.2,2612.2 cw(c5025,2599.39) v1@5025,2617.5 ; 5012.2,2612.2 ccw(c4999.39,2625) v1@5017.5,2625 ; 5012.2,2612.2 cw(c5025,2599.39) v1@5025,2617.5 ; 5012.2,2612.2 ccw(c4999.39,2625) v1@5017.5,2625 ; 5012.2,2612.2 cw(c5025,2599.39) v1@5025,2617.5 ; 5012.2,2612.2 ccw(c4999.39,2625) v1@5017.5,2625 ; 5012.2,2612.2 cw(c5025,2599.39) v1@5025,2617.5 ; 5012.2,2612.2 ccw(c4999.39,2625) v1@5017.5,2625
  other v1: 4043.5,2308 4269,2364 5576,2375 4043.5,2432 5576,2490 4223,2492 4043.5,2556 5397,2567 4043.5,2680 4223,2681 5576,2745 5397,2785 4765.57,2878 4223,2880 4412,2880 5397,2894 5576,3153 4042.94,3176 4819,3220 4042.94,3300 5395,3306 5061,3340.33 4836,3345 4223,3427 4819,3473 5481,3514 5061,3548.33 4835,3596.33 4834,3840
I2C_SCL: I2C.1 R8.1 U1.42 U4.23 | length 4025.2
  Top Layer w10: U1.42@4796.01,2644.9 4796.01,2681.01 v3(4815,2700) ; U4.23@4874.08,3045.85 4874.08,3096.45 4886.63,3109 5151.17,3109 5257.17,3003 ; R8.1@5303.5,3003 5257.17,3003 ; 4802.2,2687.2 cw(c4815,2674.39) v3@4815,2692.5 ; 4802.2,2687.2 ccw(c4789.39,2700) v3@4807.5,2700 ; 4802.2,2687.2 cw(c4815,2674.39) v3@4815,2692.5 ; 4802.2,2687.2 ccw(c4789.39,2700) v3@4807.5,2700 ; 4802.2,2687.2 cw(c4815,2674.39) v3@4815,2692.5 ; 4802.2,2687.2 ccw(c4789.39,2700) v3@4807.5,2700 ; 4802.2,2687.2 cw(c4815,2674.39) v3@4815,2692.5 ; 4802.2,2687.2 ccw(c4789.39,2700) v3@4807.5,2700 ; 4802.2,2687.2 cw(c4815,2674.39) v3@4815,2692.5 ; 4802.2,2687.2 ccw(c4789.39,2700) v3@4807.5,2700 ; 4802.2,2687.2 cw(c4815,2674.39) v3@4815,2692.5 ; 4802.2,2687.2 ccw(c4789.39,2700) v3@4807.5,2700 ; 4802.2,2687.2 ccw(c4789.39,2700) v3@4807.5,2700 ; 4802.2,2687.2 cw(c4815,2674.39) v3@4815,2692.5 ; 4802.2,2687.2 ccw(c4789.39,2700) v3@4807.5,2700 ; 4802.2,2687.2 cw(c4815,2674.39) v3@4815,2692.5 ; 5257.17,3003 ccw(c5257.17,3033.22) R8.1@5283.26,3017.97 ; 5257.17,3003 cw(c5257.17,2967.59) R8.1@5284.6,2989.98 ; 5257.17,3003 ccw(c5257.17,3038.41) R8.1@5284.6,3016.02 ; 5257.17,3003 ccw(c5257.17,3033.22) R8.1@5283.26,3017.97 ; 5257.17,3003 cw(c5257.17,2967.59) R8.1@5284.6,2989.98 ; 5257.17,3003 ccw(c5257.17,3038.41) R8.1@5284.6,3016.02 ; 5257.17,3003 ccw(c5257.17,3038.41) R8.1@5284.6,3016.02 ; 5257.17,3003 cw(c5257.17,2967.59) R8.1@5284.6,2989.98 ; 5257.17,3003 ccw(c5257.17,3033.22) R8.1@5283.26,3017.97 ; 5257.17,3003 ccw(c5257.17,3038.41) R8.1@5284.6,3016.02 ; 5257.17,3003 cw(c5257.17,2967.59) R8.1@5284.6,2989.98 ; 5257.17,3003 ccw(c5257.17,3033.22) R8.1@5283.26,3017.97 ; 5274.59,3003 ccw(c5274.59,3023.04) v1(5291.89,3012.93) ; 5274.59,3003 ccw(c5274.59,3023.04) v1(5291.89,3012.93) ; 5274.59,3003 ccw(c5274.59,3023.04) v1(5291.89,3012.93) ; 5274.59,3003 ccw(c5274.59,3023.04) v1(5291.89,3012.93)
  Bottom Layer w10: v3(4815,2700) 4978.97,2700 5269.57,2990.6 5666.97,3388 ; I2C.1@5726,3388 5666.97,3388 ; v3@4820.3,2694.7 cw(c4833.11,2681.89) 4833.11,2700 ; v3@4820.3,2694.7 cw(c4833.11,2681.89) 4833.11,2700 ; v3@4820.3,2694.7 cw(c4833.11,2681.89) 4833.11,2700 ; v3@4820.3,2694.7 cw(c4833.11,2681.89) 4833.11,2700 ; v3@4820.3,2694.7 cw(c4833.11,2681.89) 4833.11,2700 ; v3@4820.3,2694.7 cw(c4833.11,2681.89) 4833.11,2700 ; v3@4820.3,2694.7 cw(c4833.11,2681.89) 4833.11,2700 ; v3@4820.3,2694.7 cw(c4833.11,2681.89) 4833.11,2700 ; v3@4820.3,2705.3 ccw(c4833.11,2718.11) 4833.11,2700 ; v3@4820.3,2705.3 ccw(c4833.11,2718.11) 4833.11,2700 ; v3@4820.3,2705.3 ccw(c4833.11,2718.11) 4833.11,2700 ; v3@4820.3,2705.3 ccw(c4833.11,2718.11) 4833.11,2700 ; v3@4820.3,2705.3 ccw(c4833.11,2718.11) 4833.11,2700 ; v3@4820.3,2705.3 ccw(c4833.11,2718.11) 4833.11,2700 ; v3@4820.3,2705.3 ccw(c4833.11,2718.11) 4833.11,2700 ; v3@4820.3,2705.3 ccw(c4833.11,2718.11) 4833.11,2700 ; 5274.82,2995.86 cw(c5291.89,2978.79) v1@5291.89,3002.93 ; 5274.82,2995.86 ccw(c5257.75,3012.93) v1@5281.89,3012.93 ; 5274.82,2995.86 cw(c5291.89,2978.79) v1@5291.89,3002.93 ; 5274.82,2995.86 ccw(c5257.75,3012.93) v1@5281.89,3012.93 ; 5274.82,2995.86 ccw(c5257.75,3012.93) v1@5281.89,3012.93 ; 5274.82,2995.86 cw(c5291.89,2978.79) v1@5291.89,3002.93 ; 5274.82,2995.86 ccw(c5257.75,3012.93) v1@5281.89,3012.93 ; 5274.82,2995.86 cw(c5291.89,2978.79) v1@5291.89,3002.93 ; v1@5291.89,3022.93 ccw(c5291.89,3047.07) 5308.96,3030 ; v1@5291.89,3022.93 ccw(c5291.89,3047.07) 5308.96,3030 ; v1@5291.89,3022.93 ccw(c5291.89,3047.07) 5308.96,3030 ; v1@5291.89,3022.93 ccw(c5291.89,3047.07) 5308.96,3030 ; v1@5301.89,3012.93 cw(c5326.04,3012.93) 5308.96,3030 ; v1@5301.89,3012.93 cw(c5326.04,3012.93) 5308.96,3030 ; v1@5301.89,3012.93 cw(c5326.04,3012.93) 5308.96,3030 ; v1@5301.89,3012.93 cw(c5326.04,3012.93) 5308.96,3030 ; 5666.97,3388 cw(c5666.97,3342.11) I2C.1@5701.94,3371.82 ; 5666.97,3388 ccw(c5666.97,3433.89) I2C.1@5701.94,3404.18 ; 5666.97,3388 cw(c5666.97,3342.11) I2C.1@5701.94,3371.82 ; 5666.97,3388 ccw(c5666.97,3433.89) I2C.1@5701.94,3404.18 ; 5666.97,3388 cw(c5666.97,3342.11) I2C.1@5701.94,3371.82 ; 5666.97,3388 ccw(c5666.97,3433.89) I2C.1@5701.94,3404.18 ; 5666.97,3388 cw(c5666.97,3342.11) I2C.1@5701.94,3371.82 ; 5666.97,3388 ccw(c5666.97,3433.89) I2C.1@5701.94,3404.18 ; 5666.97,3388 cw(c5666.97,3342.11) I2C.1@5701.94,3371.82 ; 5666.97,3388 ccw(c5666.97,3433.89) I2C.1@5701.94,3404.18 ; 5666.97,3388 cw(c5666.97,3342.11) I2C.1@5701.94,3371.82 ; 5666.97,3388 ccw(c5666.97,3433.89) I2C.1@5701.94,3404.18 ; 5666.97,3388 ccw(c5666.97,3433.89) I2C.1@5701.94,3404.18 ; 5666.97,3388 cw(c5666.97,3342.11) I2C.1@5701.94,3371.82 ; 5666.97,3388 ccw(c5666.97,3433.89) I2C.1@5701.94,3404.18 ; 5666.97,3388 cw(c5666.97,3342.11) I2C.1@5701.94,3371.82 ; 5688.58,3388 cw(c5688.58,3360.47) I2C.1@5709.57,3378.29 ; 5688.58,3388 ccw(c5688.58,3415.53) I2C.1@5709.57,3397.71 ; 5688.58,3388 cw(c5688.58,3360.47) I2C.1@5709.57,3378.29 ; 5688.58,3388 ccw(c5688.58,3415.53) I2C.1@5709.57,3397.71 ; 5688.58,3388 cw(c5688.58,3360.47) I2C.1@5709.57,3378.29 ; 5688.58,3388 ccw(c5688.58,3415.53) I2C.1@5709.57,3397.71 ; 5688.58,3388 cw(c5688.58,3360.47) I2C.1@5709.57,3378.29 ; 5688.58,3388 ccw(c5688.58,3415.53) I2C.1@5709.57,3397.71 ; 5688.58,3388 cw(c5688.58,3360.47) I2C.1@5709.57,3378.29 ; 5688.58,3388 ccw(c5688.58,3415.53) I2C.1@5709.57,3397.71 ; 5688.58,3388 cw(c5688.58,3360.47) I2C.1@5709.57,3378.29 ; 5688.58,3388 ccw(c5688.58,3415.53) I2C.1@5709.57,3397.71 ; 5688.58,3388 ccw(c5688.58,3415.53) I2C.1@5709.57,3397.71 ; 5688.58,3388 cw(c5688.58,3360.47) I2C.1@5709.57,3378.29 ; 5688.58,3388 ccw(c5688.58,3415.53) I2C.1@5709.57,3397.71 ; 5688.58,3388 cw(c5688.58,3360.47) I2C.1@5709.57,3378.29
I2C_SDA: I2C.2 R7.1 U1.43 U4.24 | length 4027
  Top Layer w10: v3(4760,2725) 4760,2715 4776.32,2698.68 U1.43@4776.32,2644.9 ; U4.24@4854.39,3045.85 4854.39,3099.39 4880,3125 5290.5,3125 R7.1@5303.5,3112 ; v3@4767.07,2722.49 ccw(c4784.1,2716.45) 4771.32,2703.68 ; v3@4767.07,2722.49 ccw(c4784.1,2716.45) 4771.32,2703.68 ; v3@4767.07,2722.49 ccw(c4784.1,2716.45) 4771.32,2703.68 ; v3@4767.07,2722.49 ccw(c4784.1,2716.45) 4771.32,2703.68 ; v3@4767.07,2722.49 ccw(c4784.1,2716.45) 4771.32,2703.68 ; v3@4767.07,2722.49 ccw(c4784.1,2716.45) 4771.32,2703.68 ; v3@4767.07,2722.49 ccw(c4784.1,2716.45) 4771.32,2703.68 ; v3@4767.07,2722.49 ccw(c4784.1,2716.45) 4771.32,2703.68 ; 5219.46,3125 cw(c5219.46,3030.9) R7.1@5285.99,3097.44 ; 5219.46,3125 cw(c5219.46,3030.9) R7.1@5285.99,3097.44 ; 5219.46,3125 cw(c5219.46,3030.9) R7.1@5285.99,3097.44 ; 5219.46,3125 cw(c5219.46,3030.9) R7.1@5285.99,3097.44 ; 5243.6,3125 cw(c5243.6,3055.05) R7.1@5293.06,3104.51 ; 5243.6,3125 cw(c5243.6,3055.05) R7.1@5293.06,3104.51 ; 5243.6,3125 cw(c5243.6,3055.05) R7.1@5293.06,3104.51 ; 5243.6,3125 cw(c5243.6,3055.05) R7.1@5293.06,3104.51 ; 5250.22,3125 cw(c5250.22,3063.15) R7.1@5293.95,3106.88 ; 5250.22,3125 cw(c5250.22,3063.15) R7.1@5293.95,3106.88 ; 5250.22,3125 cw(c5250.22,3063.15) R7.1@5293.95,3106.88 ; 5250.22,3125 cw(c5250.22,3063.15) R7.1@5293.95,3106.88 ; 5267.74,3125 cw(c5267.74,3079.19) R7.1@5300.13,3111.58 ; 5267.74,3125 cw(c5267.74,3079.19) R7.1@5300.13,3111.58 ; 5267.74,3125 cw(c5267.74,3079.19) R7.1@5300.13,3111.58 ; 5267.74,3125 cw(c5267.74,3079.19) R7.1@5300.13,3111.58 ; 5274.36,3125 cw(c5274.36,3087.29) v1(5301.02,3113.96) ; 5274.36,3125 cw(c5274.36,3087.29) v1(5301.02,3113.96) ; 5274.36,3125 cw(c5274.36,3087.29) v1(5301.02,3113.96) ; 5274.36,3125 cw(c5274.36,3087.29) v1(5301.02,3113.96)
  Bottom Layer w10: v3(4760,2725) 4912.07,2725 5269.57,3082.5 5675.07,3488 ; I2C.2@5726,3488 5675.07,3488 ; v3@4765.3,2719.7 cw(c4778.11,2706.89) 4778.11,2725 ; v3@4765.3,2719.7 cw(c4778.11,2706.89) 4778.11,2725 ; v3@4765.3,2719.7 cw(c4778.11,2706.89) 4778.11,2725 ; v3@4765.3,2719.7 cw(c4778.11,2706.89) 4778.11,2725 ; v3@4765.3,2719.7 cw(c4778.11,2706.89) 4778.11,2725 ; v3@4765.3,2719.7 cw(c4778.11,2706.89) 4778.11,2725 ; v3@4765.3,2719.7 cw(c4778.11,2706.89) 4778.11,2725 ; v3@4765.3,2719.7 cw(c4778.11,2706.89) 4778.11,2725 ; v3@4765.3,2730.3 ccw(c4778.11,2743.11) 4778.11,2725 ; v3@4765.3,2730.3 ccw(c4778.11,2743.11) 4778.11,2725 ; v3@4765.3,2730.3 ccw(c4778.11,2743.11) 4778.11,2725 ; v3@4765.3,2730.3 ccw(c4778.11,2743.11) 4778.11,2725 ; v3@4765.3,2730.3 ccw(c4778.11,2743.11) 4778.11,2725 ; v3@4765.3,2730.3 ccw(c4778.11,2743.11) 4778.11,2725 ; v3@4765.3,2730.3 ccw(c4778.11,2743.11) 4778.11,2725 ; v3@4765.3,2730.3 ccw(c4778.11,2743.11) 4778.11,2725 ; 5283.95,3096.88 cw(c5301.02,3079.81) v1@5301.02,3103.96 ; 5283.95,3096.88 ccw(c5266.88,3113.96) v1@5291.02,3113.96 ; 5283.95,3096.88 cw(c5301.02,3079.81) v1@5301.02,3103.96 ; 5283.95,3096.88 ccw(c5266.88,3113.96) v1@5291.02,3113.96 ; 5283.95,3096.88 ccw(c5266.88,3113.96) v1@5291.02,3113.96 ; 5283.95,3096.88 cw(c5301.02,3079.81) v1@5301.02,3103.96 ; 5283.95,3096.88 ccw(c5266.88,3113.96) v1@5291.02,3113.96 ; 5283.95,3096.88 cw(c5301.02,3079.81) v1@5301.02,3103.96 ; v1@5301.02,3123.96 ccw(c5301.02,3148.1) 5318.09,3131.03 ; v1@5301.02,3123.96 ccw(c5301.02,3148.1) 5318.09,3131.03 ; v1@5301.02,3123.96 ccw(c5301.02,3148.1) 5318.09,3131.03 ; v1@5301.02,3123.96 ccw(c5301.02,3148.1) 5318.09,3131.03 ; v1@5311.02,3113.96 cw(c5335.16,3113.96) 5318.09,3131.03 ; v1@5311.02,3113.96 cw(c5335.16,3113.96) 5318.09,3131.03 ; v1@5311.02,3113.96 cw(c5335.16,3113.96) 5318.09,3131.03 ; v1@5311.02,3113.96 cw(c5335.16,3113.96) 5318.09,3131.03 ; 5675.07,3488 cw(c5675.07,3458.3) I2C.2@5700.01,3474.43 ; 5675.07,3488 ccw(c5675.07,3517.7) I2C.2@5700.01,3501.57 ; 5675.07,3488 cw(c5675.07,3458.3) I2C.2@5700.01,3474.43 ; 5675.07,3488 ccw(c5675.07,3517.7) I2C.2@5700.01,3501.57 ; 5675.07,3488 cw(c5675.07,3458.3) I2C.2@5700.01,3474.43 ; 5675.07,3488 ccw(c5675.07,3517.7) I2C.2@5700.01,3501.57 ; 5675.07,3488 cw(c5675.07,3458.3) I2C.2@5700.01,3474.43 ; 5675.07,3488 ccw(c5675.07,3517.7) I2C.2@5700.01,3501.57 ; 5675.07,3488 cw(c5675.07,3458.3) I2C.2@5700.01,3474.43 ; 5675.07,3488 ccw(c5675.07,3517.7) I2C.2@5700.01,3501.57 ; 5675.07,3488 cw(c5675.07,3458.3) I2C.2@5700.01,3474.43 ; 5675.07,3488 ccw(c5675.07,3517.7) I2C.2@5700.01,3501.57 ; 5675.07,3488 ccw(c5675.07,3517.7) I2C.2@5700.01,3501.57 ; 5675.07,3488 cw(c5675.07,3458.3) I2C.2@5700.01,3474.43 ; 5675.07,3488 ccw(c5675.07,3517.7) I2C.2@5700.01,3501.57 ; 5675.07,3488 cw(c5675.07,3458.3) I2C.2@5700.01,3474.43
INT: R10.2 U1.39 U4.12 | length 2073.3
  Top Layer w10: U1.39@4855.06,2644.9 4855.06,2605.06 4855.76,2604.37 4901.06,2604.37 4910.43,2613.74 4910.43,2645.43 v1(4935,2670) ; U4.12@4952.82,2874.59 4952.82,2842.18 5119,2676 v1(5302.94,2676) ; 4917.93,2652.93 cw(c4935,2635.86) v1@4935,2660 ; 4917.93,2652.93 ccw(c4900.86,2670) v1@4925,2670 ; 4917.93,2652.93 cw(c4935,2635.86) v1@4935,2660 ; 4917.93,2652.93 ccw(c4900.86,2670) v1@4925,2670 ; 4917.93,2652.93 ccw(c4900.86,2670) v1@4925,2670 ; 4917.93,2652.93 cw(c4935,2635.86) v1@4935,2660 ; 4917.93,2652.93 ccw(c4900.86,2670) v1@4925,2670 ; 4917.93,2652.93 cw(c4935,2635.86) v1@4935,2660 ; 4922.2,2657.2 cw(c4935,2644.39) v1@4935,2662.5 ; 4922.2,2657.2 ccw(c4909.39,2670) v1@4927.5,2670 ; 4922.2,2657.2 cw(c4935,2644.39) v1@4935,2662.5 ; 4922.2,2657.2 ccw(c4909.39,2670) v1@4927.5,2670 ; 4922.2,2657.2 cw(c4935,2644.39) v1@4935,2662.5 ; 4922.2,2657.2 ccw(c4909.39,2670) v1@4927.5,2670 ; 4922.2,2657.2 cw(c4935,2644.39) v1@4935,2662.5 ; 4922.2,2657.2 ccw(c4909.39,2670) v1@4927.5,2670 ; 5250.28,2676 cw(c5250.28,2626.29) R10.2@5285.43,2661.44 ; 5250.28,2676 ccw(c5250.28,2725.71) R10.2@5285.43,2690.56 ; 5250.28,2676 cw(c5250.28,2626.29) R10.2@5285.43,2661.44 ; 5250.28,2676 ccw(c5250.28,2725.71) R10.2@5285.43,2690.56 ; 5250.28,2676 ccw(c5250.28,2725.71) R10.2@5285.43,2690.56 ; 5250.28,2676 cw(c5250.28,2626.29) R10.2@5285.43,2661.44 ; 5250.28,2676 ccw(c5250.28,2725.71) R10.2@5285.43,2690.56 ; 5250.28,2676 cw(c5250.28,2626.29) R10.2@5285.43,2661.44 ; R10.2@5278.8,2676 cw(c5278.8,2651.86) R10.2@5295.87,2668.93 ; R10.2@5278.8,2676 ccw(c5278.8,2700.14) R10.2@5295.87,2683.07 ; R10.2@5278.8,2676 cw(c5278.8,2651.86) R10.2@5295.87,2668.93 ; R10.2@5278.8,2676 ccw(c5278.8,2700.14) R10.2@5295.87,2683.07 ; R10.2@5278.8,2676 ccw(c5278.8,2700.14) R10.2@5295.87,2683.07 ; R10.2@5278.8,2676 cw(c5278.8,2651.86) R10.2@5295.87,2668.93 ; R10.2@5278.8,2676 ccw(c5278.8,2700.14) R10.2@5295.87,2683.07 ; R10.2@5278.8,2676 cw(c5278.8,2651.86) R10.2@5295.87,2668.93
  Bottom Layer w10: v1(5302.94,2676) 4941,2676 v1(4935,2670) ; v1(4935,2670) cw(c4949.48,2655.51) 4949.48,2676 ; v1(4935,2670) cw(c4949.48,2655.51) 4949.48,2676 ; v1(4935,2670) cw(c4949.48,2655.51) 4949.48,2676 ; v1(4935,2670) cw(c4949.48,2655.51) 4949.48,2676 ; v1@4942.07,2662.93 cw(c4973.63,2631.37) 4973.63,2676 ; v1@4942.07,2662.93 cw(c4973.63,2631.37) 4973.63,2676 ; v1@4942.07,2662.93 cw(c4973.63,2631.37) 4973.63,2676 ; v1@4942.07,2662.93 cw(c4973.63,2631.37) 4973.63,2676 ; 5278.8,2676 cw(c5278.8,2651.86) v1@5295.87,2668.93 ; 5278.8,2676 ccw(c5278.8,2700.14) v1@5295.87,2683.07 ; 5278.8,2676 cw(c5278.8,2651.86) v1@5295.87,2668.93 ; 5278.8,2676 ccw(c5278.8,2700.14) v1@5295.87,2683.07 ; 5278.8,2676 ccw(c5278.8,2700.14) v1@5295.87,2683.07 ; 5278.8,2676 cw(c5278.8,2651.86) v1@5295.87,2668.93 ; 5278.8,2676 ccw(c5278.8,2700.14) v1@5295.87,2683.07 ; 5278.8,2676 cw(c5278.8,2651.86) v1@5295.87,2668.93
MISO: SPI:W_CSN-SCK-MISO-MOSI-W_IRQ-W_CE.3 U1.16 | length 1231.2
  Top Layer w10: U1.16@4736.95,2290.57 4736.95,2118.93 4734,2115.98 4734,2061 4753,2042 4905,2042 5022,2159 5188,2159 SPI:W_CSN-SCK-MISO-MOSI-W_IRQ-W_CE.3@5253,2094 ; 5201.79,2145.21 ccw(c5253,2196.43) SPI:W_CSN-SCK-MISO-MOSI-W_IRQ-W_CE.3@5253,2124 ; 5201.79,2145.21 ccw(c5253,2196.43) SPI:W_CSN-SCK-MISO-MOSI-W_IRQ-W_CE.3@5253,2124 ; 5201.79,2145.21 ccw(c5253,2196.43) SPI:W_CSN-SCK-MISO-MOSI-W_IRQ-W_CE.3@5253,2124 ; 5213.86,2133.14 cw(c5179.72,2099) SPI:W_CSN-SCK-MISO-MOSI-W_IRQ-W_CE.3@5228,2099 ; 5213.86,2133.14 cw(c5179.72,2099) SPI:W_CSN-SCK-MISO-MOSI-W_IRQ-W_CE.3@5228,2099 ; 5213.86,2133.14 cw(c5179.72,2099) SPI:W_CSN-SCK-MISO-MOSI-W_IRQ-W_CE.3@5228,2099 ; 5218.86,2128.14 ccw(c5253,2162.28) SPI:W_CSN-SCK-MISO-MOSI-W_IRQ-W_CE.3@5253,2114 ; 5218.86,2128.14 ccw(c5253,2162.28) SPI:W_CSN-SCK-MISO-MOSI-W_IRQ-W_CE.3@5253,2114 ; 5218.86,2128.14 ccw(c5253,2162.28) SPI:W_CSN-SCK-MISO-MOSI-W_IRQ-W_CE.3@5253,2114